# Allegro board OSCILLATOR.brd
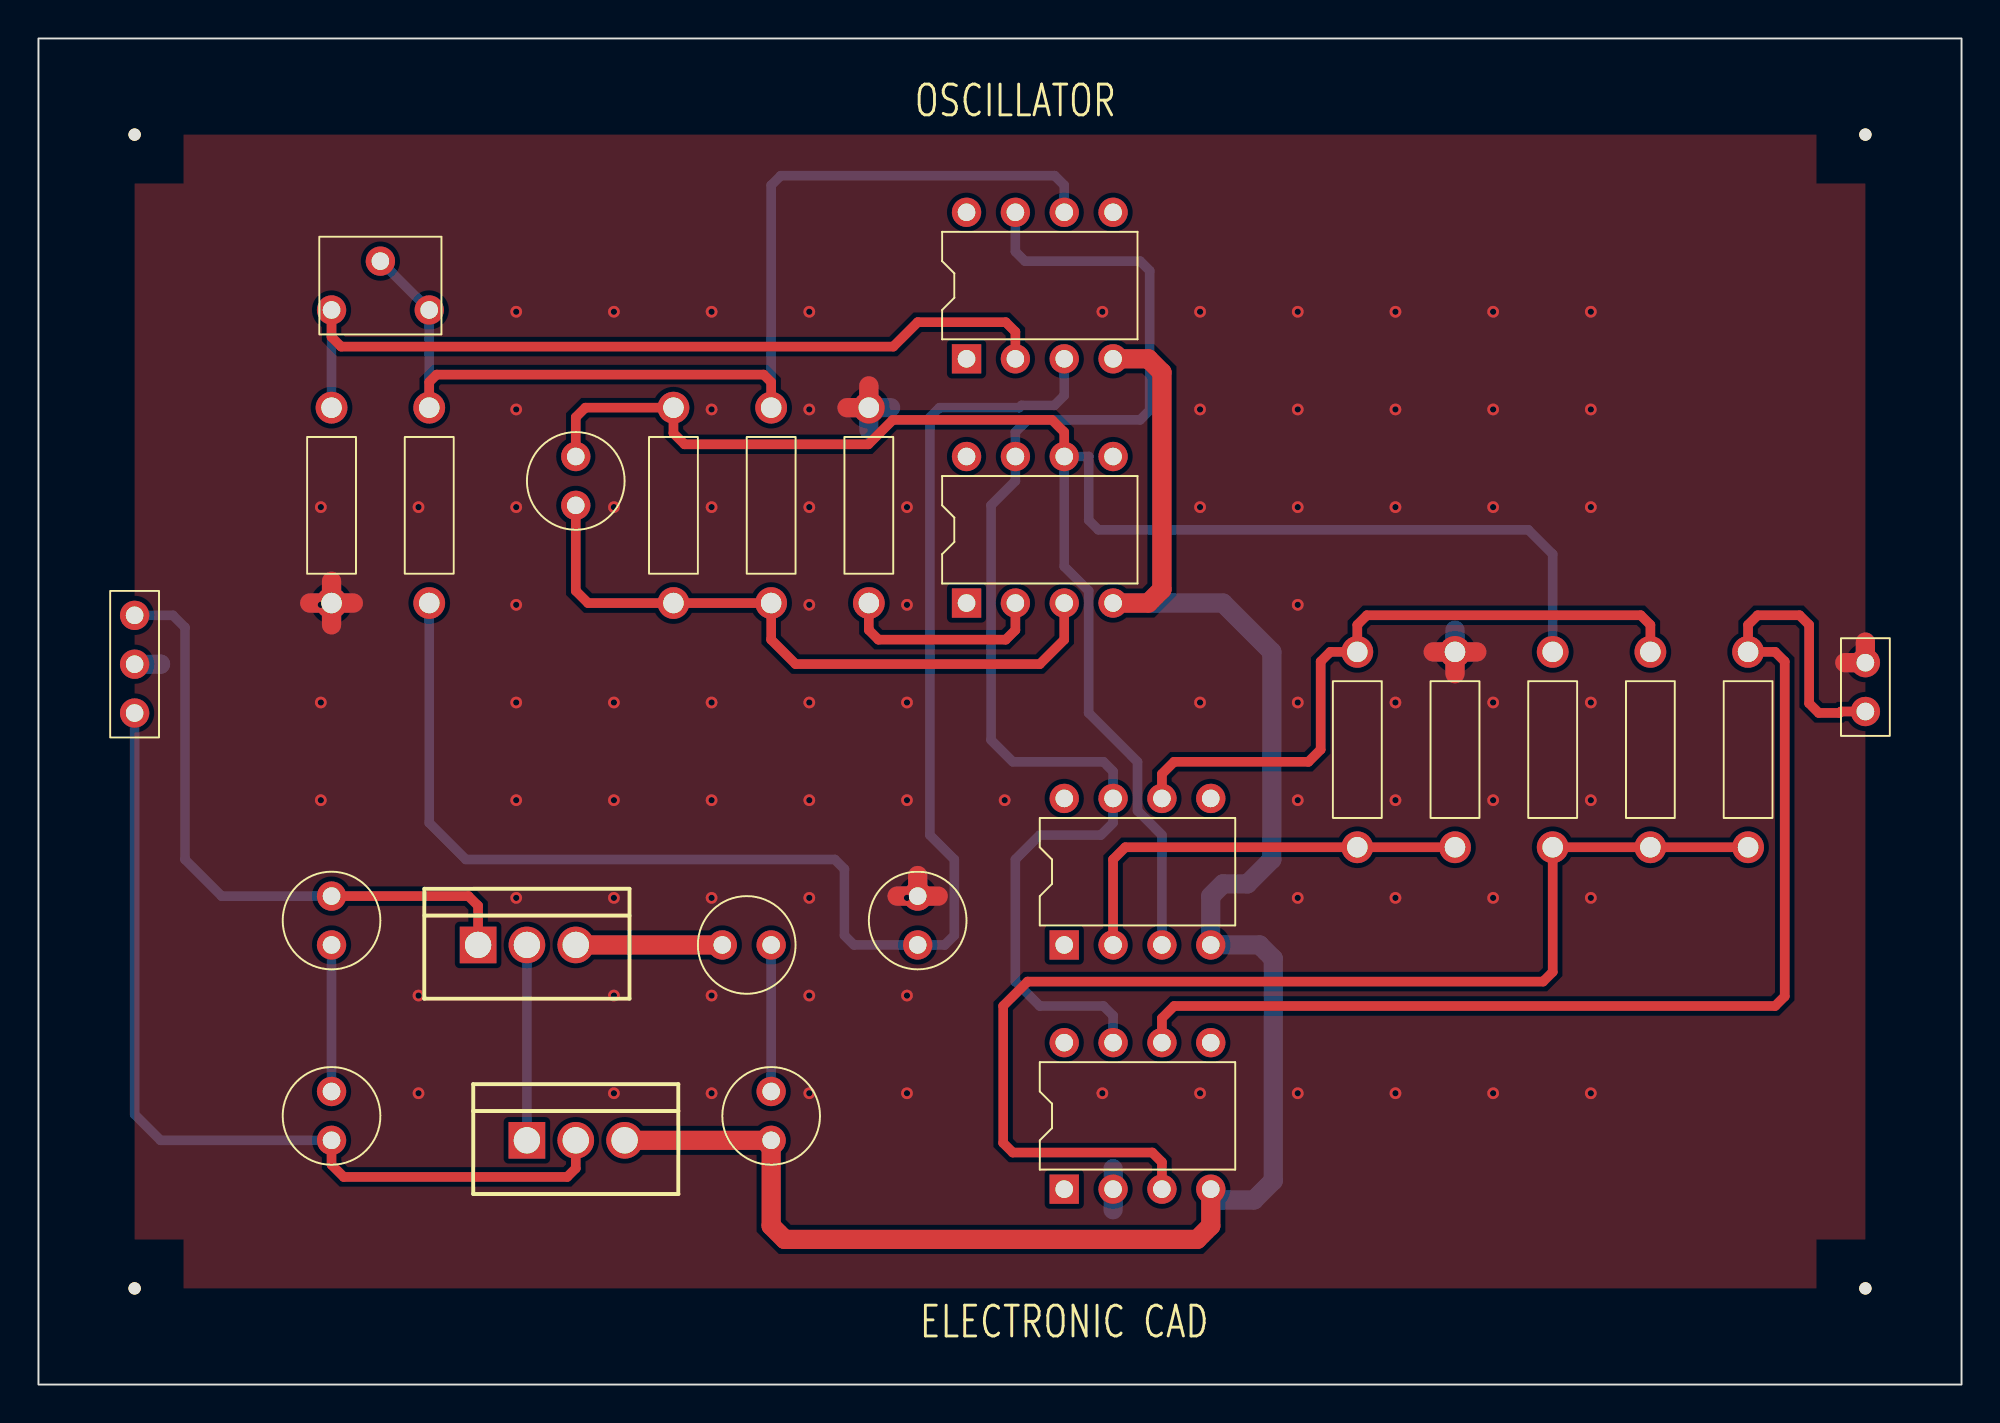
[diagram p0: board, top side]
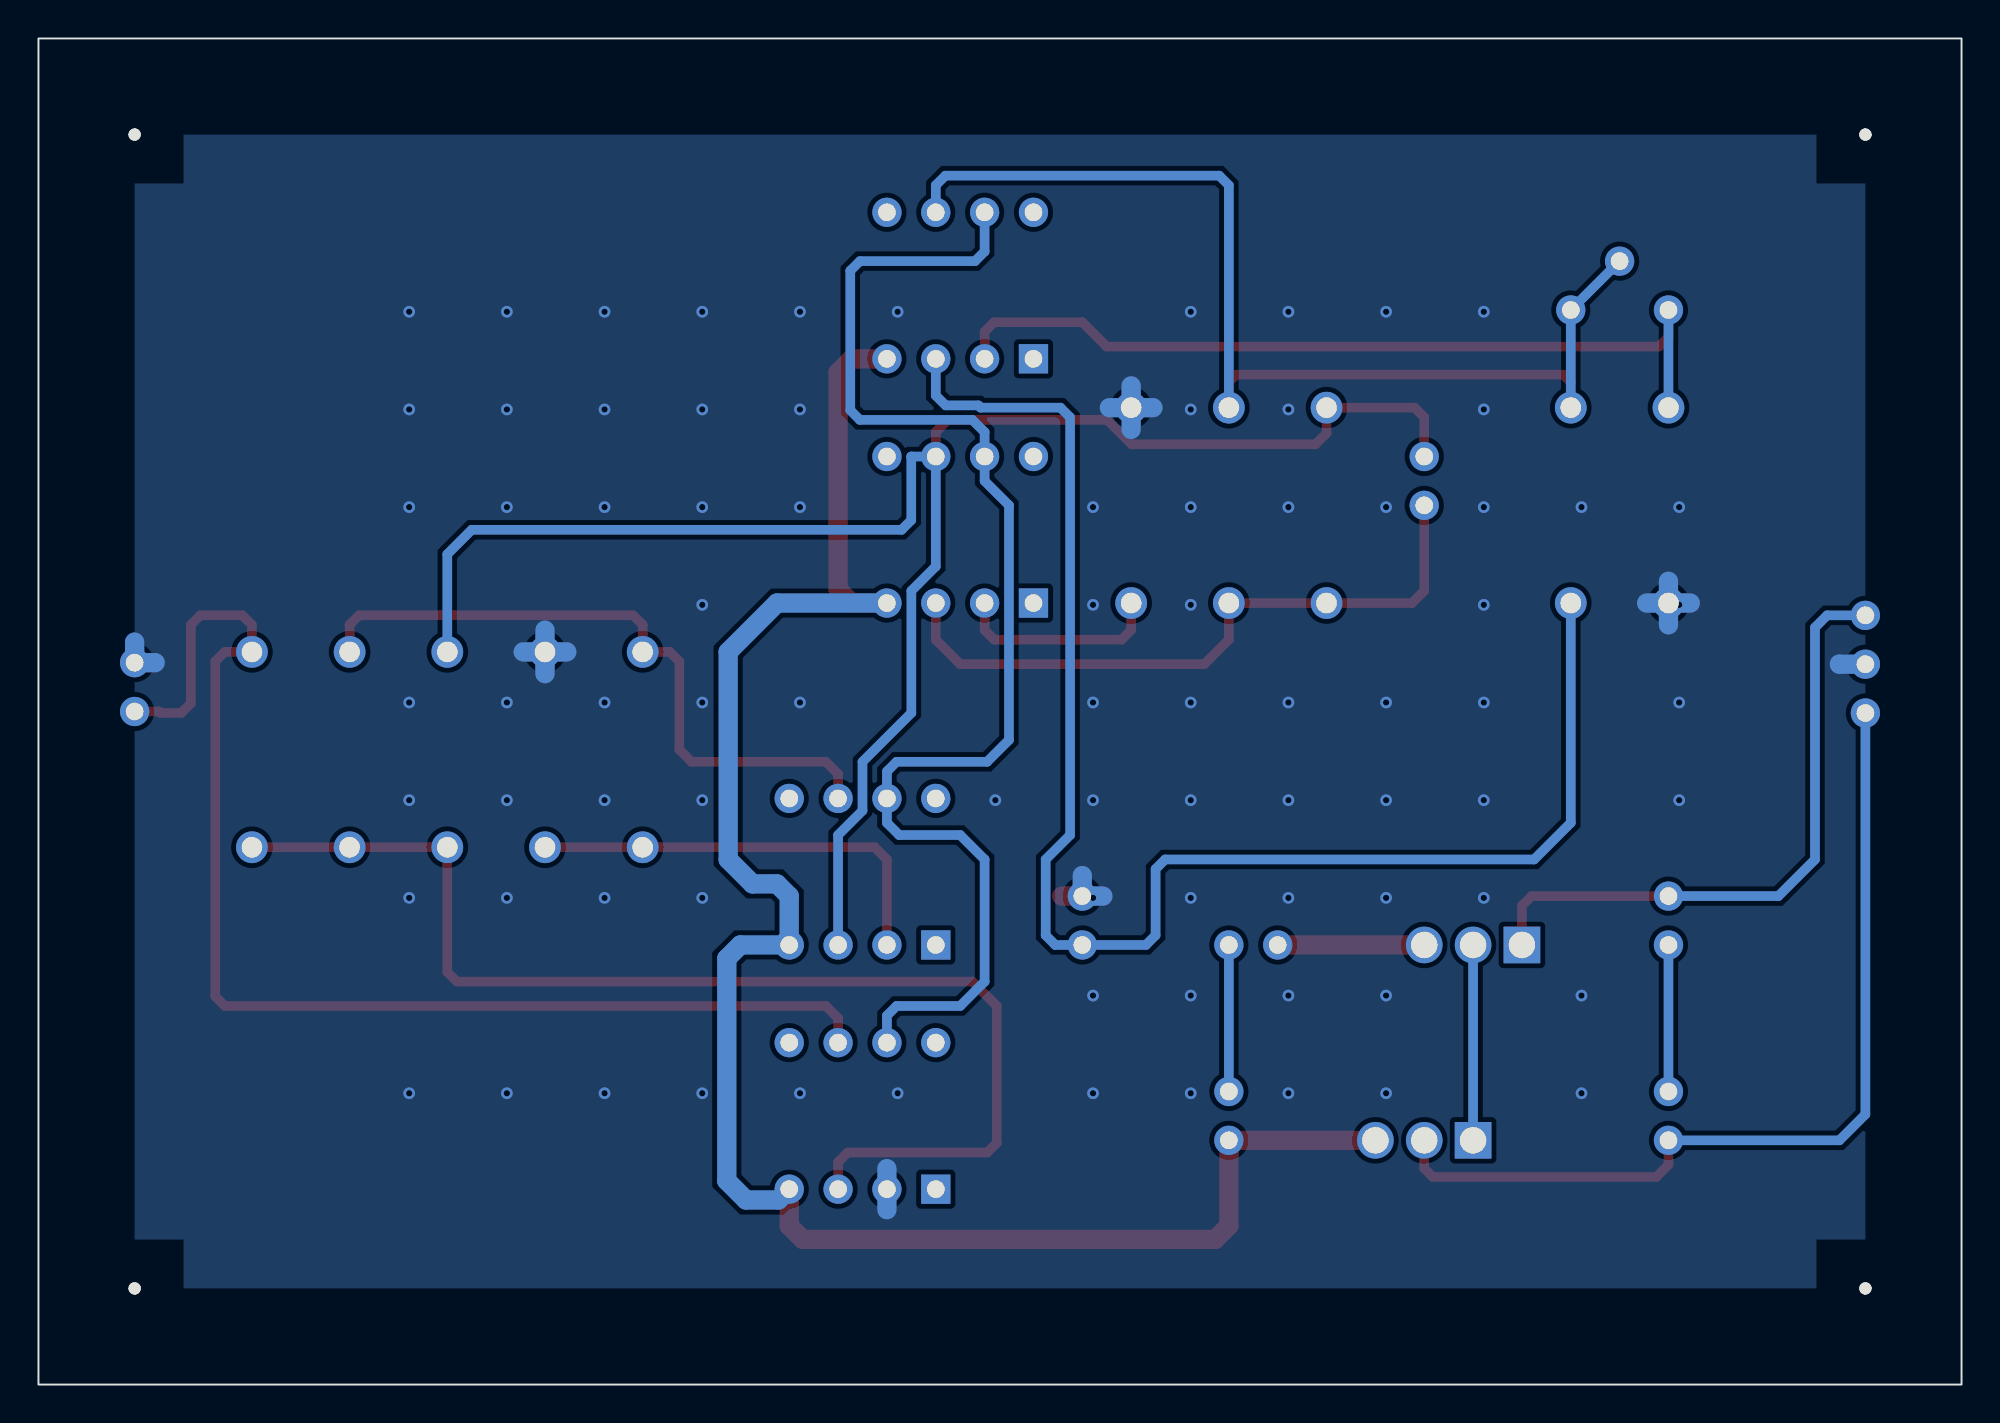
[diagram p1: board, bottom side, seen from below]

Outline 100 x 70 mm; copper layers: TOP, BOTTOM. Coordinates in mm from the lower left corner of the outline.
Outline path: rectangle 0,0 100,70

## Design rules (mm)
constraint set DEFAULT: min track width 0.5
nets with their own width: min track width 1; nets +VCC -VCC GND

## Placement (name value [footprint] x y rotation side)
C1  0.01uF  [CAP196]  27.94 48.26 180 top
C2  270pF  [CAP196]  45.72 22.86 0 top
C3  0.1uF  [CAP196]  15.24 25.4 180 top
C4  0.1uF  [CAP196]  35.56 22.86 270 top
C5  0.1uF  [CAP196]  15.24 15.24 180 top
C6  0.1uF  [CAP196]  38.1 15.24 180 top
J1  CON2  [JUMPER2]  95 35 90 top
J2  CON3  [JUMPER3]  5 40 270 top
NOREF  -  [unnamed]  95 5 0 top
NOREF#2  -  [#2]  0 0 90 top
NOREF#3  -  [unnamed]  5 65 0 top
NOREF#4  -  [unnamed]  95 65 0 top
NOREF#5  -  [unnamed]  5 5 0 top
NOREF#6  -  [#2]  0 70 0 top
R1  10K  [RES400]  20.32 40.64 0 top
R2  100K  [RES400]  33.02 40.64 0 top
R3  10K  [RES400]  78.74 38.1 180 top
R4  10K  [RES400]  88.9 27.94 0 top
R5  62K  [RES400]  38.1 50.8 180 top
R6  10K  [RES400]  43.18 40.64 0 top
R7  10K  [RES400]  83.82 38.1 180 top
R8  10K  [RES400]  15.24 40.64 0 top
R9  10K  [RES400]  68.58 27.94 0 top
R10  10K  [RES400]  73.66 38.1 180 top
U1  LF351  [DIP8_3]  48.26 53.34 90 top
U2  LF351  [DIP8_3]  48.26 40.64 90 top
U3  LF351  [DIP8_3]  53.34 22.86 90 top
U4  LF351  [DIP8_3]  53.34 10.16 90 top
U5  LM7812C  [TO220AB]  22.86 22.86 0 top
U6  LM7912C  [TO220AB]  25.4 12.7 0 top
VR1  1M  [RESADJ]  20.32 55.88 270 top

## Library data of the parts
C1-C6 = CAP NP: Tolerance: ***; User Part Number: ***
J1 = CON2: User Part Number: ***
J2 = CON3: User Part Number: ***
R1-R10 = R: Tolerance: ***; User Part Number: ***
U1-U4 = LF351: Tolerance: ***; User Part Number: ***
U5 = LM7812C_5
U6 = LM7912C_1
VR1 = POT: Tolerance: ***; User Part Number: ***

## Footprints (pads in the part's own frame, mm; a bottom-side part is the same pattern mirrored in y, then rotated)
CAP196
  round 1.524 hole 0.914: 1(0,0) 2(0,2.54)
DIP8_3
  rect 1.524x1.524 hole 0.914: 1(0,0)
  round 1.524 hole 0.914: 2(0,-2.54) 3(0,-5.08) 4(0,-7.62) 5(7.62,-7.62) 6(7.62,-5.08) 7(7.62,-2.54) 8(7.62,0)
JUMPER2
  round 1.524 hole 0.914: 1(0,0) 2(2.54,0)
JUMPER3
  round 1.524 hole 0.914: 1(0,0) 2(2.54,0) 3(5.08,0)
RES400
  round 1.651 hole 1.067: 1(0,0) 2(0,10.16)
RESADJ
  round 1.524 hole 0.914: 1(0,0) 2(-2.54,-2.54) 3(0,-5.08)
TO220AB
  rect 1.905x1.905 hole 1.372: 1(0,0)
  round 1.905 hole 1.372: 2(2.54,0) 3(5.08,0)
unnamed
  round 0.635 hole 3.175 unplated: (0,0)

## Nets
+VCC: C4.1 U5.3(VOUT)
-VCC: C6.2 U1.4(V-) U2.4(V-) U3.4(V-) U4.4(V-) U6.3(VOUT)
GND: C2.2 J1.2 J2.2 R6.2 R8.1 R10.1 U4.2
VCC: U1.7 U2.7 U3.7 U4.7
OUT: J1.1 R4.2 U4.6
SIG: C1.1 R2.2 R3.1 U2.6 U3.3
N00311: R8.2 U1.2 VR1.3
N00315: C2.1 R1.1 U1.3
N00400: R1.2 R5.1 U1.6 VR1.1 VR1.2(WIPER)
N00458: C1.2 R2.1 R5.2 U2.3
N00462: R6.1 U2.2
N01006: R9.1 R10.2 U3.2
N01028: R7.1 R9.2 U3.6
N01032: R3.2 R4.1 R7.2 U4.3
N01628: C3.1 J2.1 U5.1
N01640: C5.2 J2.3 U6.2
N01652: C4.2 C6.1
N01656: C3.2 C5.1
N01786: U5.2 U6.1

Pads without a net: U1 1 5 8; U2 1 5 8; U3 1 5 8; U4 1 5 8

## Via types
v1: diameter 0.61, hole 0.33, TOP to BOTTOM, 82 vias

## Routing (per net, layer and track width the routed paths; a pad name or vN(x,y) marks a point on that pad's centre or on a via; arc(x,y) is an arc through that point)
+VCC: length 7.6
  TOP w1: U5.3 C4.1
-VCC: length 100
  TOP w1: U2.4 57.71,40.64 58.42,41.35 58.42,52.63 57.71,53.34 U1.4 ; U4.4 60.96,8.26 60.25,7.55 38.81,7.55 38.1,8.26 C6.2 U6.3
  BOTTOM w1: U4.4 61.52,9.6 63.21,9.6 64.21,10.6 64.21,22.15 63.5,22.86 U3.4 60.96,25.4 61.59,26.04 62.87,26.04 64.14,27.3 64.14,38.1 61.59,40.64 U2.4
GND: length 36.9
  TOP w1: R8.1 16.37,40.64 ; R8.1 15.24,41.77 ; R8.1 15.24,39.51 ; R8.1 14.11,40.64 ; R10.1 74.79,38.1 ; R10.1 72.53,38.1 ; R10.1 73.66,36.97 ; 44.65,25.4 C2.2 ; C2.2 45.72,26.47 ; C2.2 46.79,25.4 ; 93.93,37.54 J1.2 95,38.61 ; 43.18,51.93 R6.2 42.05,50.8
  BOTTOM w1: 93.93,37.54 J1.2 95,38.61 ; 6.35,37.47 6.34,37.46 J2.2 ; 45.72,26.47 C2.2 44.65,25.4 ; R10.1 73.66,39.23 ; R10.1 72.53,38.1 ; R10.1 74.79,38.1 ; R10.1 73.66,36.97 ; R8.1 15.24,41.77 ; R8.1 15.24,39.51 ; R8.1 16.37,40.64 ; R8.1 14.11,40.64 ; R6.2 43.18,51.93 ; R6.2 42.05,50.8 ; R6.2 44.31,50.8 ; R6.2 43.18,49.67 ; 55.88,11.23 U4.2 55.88,9.09
  vias: v1(14.68,45.63) v1(14.68,40.55) v1(14.68,35.47) v1(14.68,30.39) v1(19.76,45.63) v1(19.76,20.23) v1(19.76,15.15) v1(24.84,55.79) v1(24.84,50.71) v1(24.84,45.63) v1(24.84,40.55) v1(24.84,35.47) v1(24.84,30.39) v1(24.84,25.31) v1(29.92,55.79) v1(29.92,45.63) v1(29.92,35.47) v1(29.92,30.39) v1(29.92,25.31) v1(29.92,20.23) v1(29.92,15.15) v1(35,55.79) v1(35,50.71) v1(35,45.63) v1(35,35.47) v1(35,30.39) v1(35,25.31) v1(35,20.23) v1(35,15.15) v1(40.08,55.79) v1(40.08,50.71) v1(40.08,45.63) v1(40.08,40.55) v1(40.08,35.47) v1(40.08,30.39) v1(40.08,25.31) v1(40.08,20.23) v1(40.08,15.15) v1(45.16,45.63) v1(45.16,40.55) v1(45.16,35.47) v1(45.16,30.39) v1(45.16,25.31) v1(45.16,20.23) v1(45.16,15.15) v1(50.24,30.39) v1(55.32,55.79) v1(55.32,15.15) v1(60.4,55.79) v1(60.4,50.71) v1(60.4,45.63) v1(60.4,35.47) v1(60.4,15.15) v1(65.48,55.79) v1(65.48,50.71) v1(65.48,45.63) v1(65.48,40.55) v1(65.48,35.47) v1(65.48,30.39) v1(65.48,25.31) v1(65.48,15.15) v1(70.56,55.79) v1(70.56,50.71) v1(70.56,45.63) v1(70.56,35.47) v1(70.56,30.39) v1(70.56,25.31) v1(70.56,15.15) v1(75.64,55.79) v1(75.64,50.71) v1(75.64,45.63) v1(75.64,35.47) v1(75.64,30.39) v1(75.64,25.31) v1(75.64,15.15) v1(80.72,55.79) v1(80.72,50.71) v1(80.72,45.63) v1(80.72,35.47) v1(80.72,30.39) v1(80.72,25.31) v1(80.72,15.15)
VCC: length 69.8
  BOTTOM w0.5: U1.7 50.8,58.92 51.3,58.42 57.28,58.42 57.78,57.92 57.78,50.66 57.28,50.16 51.44,50.16 50.8,49.53 U2.7 50.8,46.99 49.53,45.72 49.53,33.52 50.67,32.38 55.38,32.38 55.88,31.89 U3.7 55.88,29.21 55.24,28.57 52.07,28.57 50.8,27.3 50.8,20.95 52.07,19.68 55.38,19.68 55.88,19.18 U4.7
OUT: length 65.9
  TOP w0.5: U4.6 58.42,19.05 59.05,19.68 90.31,19.68 90.81,20.18 90.81,37.6 90.31,38.1 R4.2 88.9,39.51 89.4,40.01 91.58,40.01 92.08,39.51 92.08,35.42 92.58,34.92 93.66,34.92 93.73,35 J1.1
SIG: length 93.3
  TOP w0.5: C1.1 27.94,50.3 28.44,50.8 R2.2 33.02,49.47 33.59,48.9 43.16,48.9 44.43,50.16 52.7,50.16 53.34,49.53 U2.6
  BOTTOM w0.5: R3.1 78.74,43.18 77.47,44.45 55.11,44.45 54.61,44.95 54.61,48.26 54.61,48.26 U2.6 53.34,42.55 54.61,41.27 54.61,34.92 57.15,32.38 57.15,29.84 58.42,28.57 U3.3
N00311: length 44.4
  TOP w0.5: VR1.3 15.24,54.48 15.74,53.98 44.45,53.98 45.72,55.24 50.3,55.24 50.8,54.74 U1.2
  BOTTOM w0.5: VR1.3 R8.2
N00315: length 80.4
  BOTTOM w0.5: R1.1 20.32,29.21 22.23,27.3 41.41,27.3 41.91,26.8 41.91,23.36 42.41,22.86 C2.1 47.12,22.86 47.62,23.36 47.62,27.3 46.35,28.57 46.35,50.3 46.85,50.8 51,50.8 51.12,50.92 52.83,50.92 53.34,51.43 U1.3
N00400: length 58.1
  TOP w0.5: R5.1 38.1,52.13 37.71,52.52 20.71,52.52 20.32,52.13 R1.2
  BOTTOM w0.5: R5.1 38.1,62.37 38.6,62.87 52.84,62.87 53.34,62.37 U1.6 ; R1.2 VR1.1 VR1.2
N00458: length 35
  TOP w0.5: C1.2 27.94,41.27 28.57,40.64 R2.1 R5.2 38.1,38.73 39.37,37.47 52.07,37.47 53.34,38.74 U2.3
N00462: length 10.8
  TOP w0.5: R6.1 43.18,39.23 43.68,38.73 50.3,38.73 50.8,39.24 U2.2
N01006: length 22.5
  TOP w0.5: U3.2 55.88,27.3 56.52,27.94 R9.1 R10.2
N01028: length 35.2
  TOP w0.5: U3.6 58.42,31.75 59.05,32.38 66.04,32.38 66.67,33.02 66.67,37.6 67.17,38.1 R9.2 68.58,39.51 69.08,40.01 83.32,40.01 83.82,39.51 R7.1
N01032: length 63.1
  TOP w0.5: R4.1 R7.2 R3.2 78.74,21.45 78.24,20.95 51.44,20.95 50.16,19.68 50.16,12.56 50.66,12.06 57.92,12.06 58.42,11.56 U4.3
N01628: length 33.2
  TOP w0.5: U5.1 22.86,24.9 22.36,25.4 C3.1
  BOTTOM w0.5: J2.1 6.99,40 7.62,39.37 7.62,27.3 9.53,25.4 C3.1
N01640: length 47.5
  TOP w0.5: C5.2 15.24,11.43 15.88,10.79 27.49,10.79 27.94,11.24 U6.2
  BOTTOM w0.5: C5.2 6.35,12.7 5,14.05 J2.3
N01652: length 7.6
  BOTTOM w0.5: C4.2 C6.1
N01656: length 7.6
  BOTTOM w0.5: C3.2 C5.1
N01786: length 10.2
  BOTTOM w0.5: U5.2 U6.1

## Copper pours and planes (outline as drawn; the poured copper is in the pictures)
GND on TOP, BOTTOM: 95,5 95,65 5,65 5,5

## Text on the board
Ref Des/Silkscreen Top: OSCILLATOR | ELECTRONIC CAD
DIMENSION: FIGURE | FINISHED_SIZE | 0.914 | 1.067 | 1.372 | 3.175 | DRILL CHART: TOP to BOTTOM | ALL UNITS ARE IN MILLIMETERS | PLATED | NON-PLATED | QTY | 52 | 20 | 6 | 4
